# EAGLE board ece411_t2_schematic_FINAL (EAGLE 9.6.2)
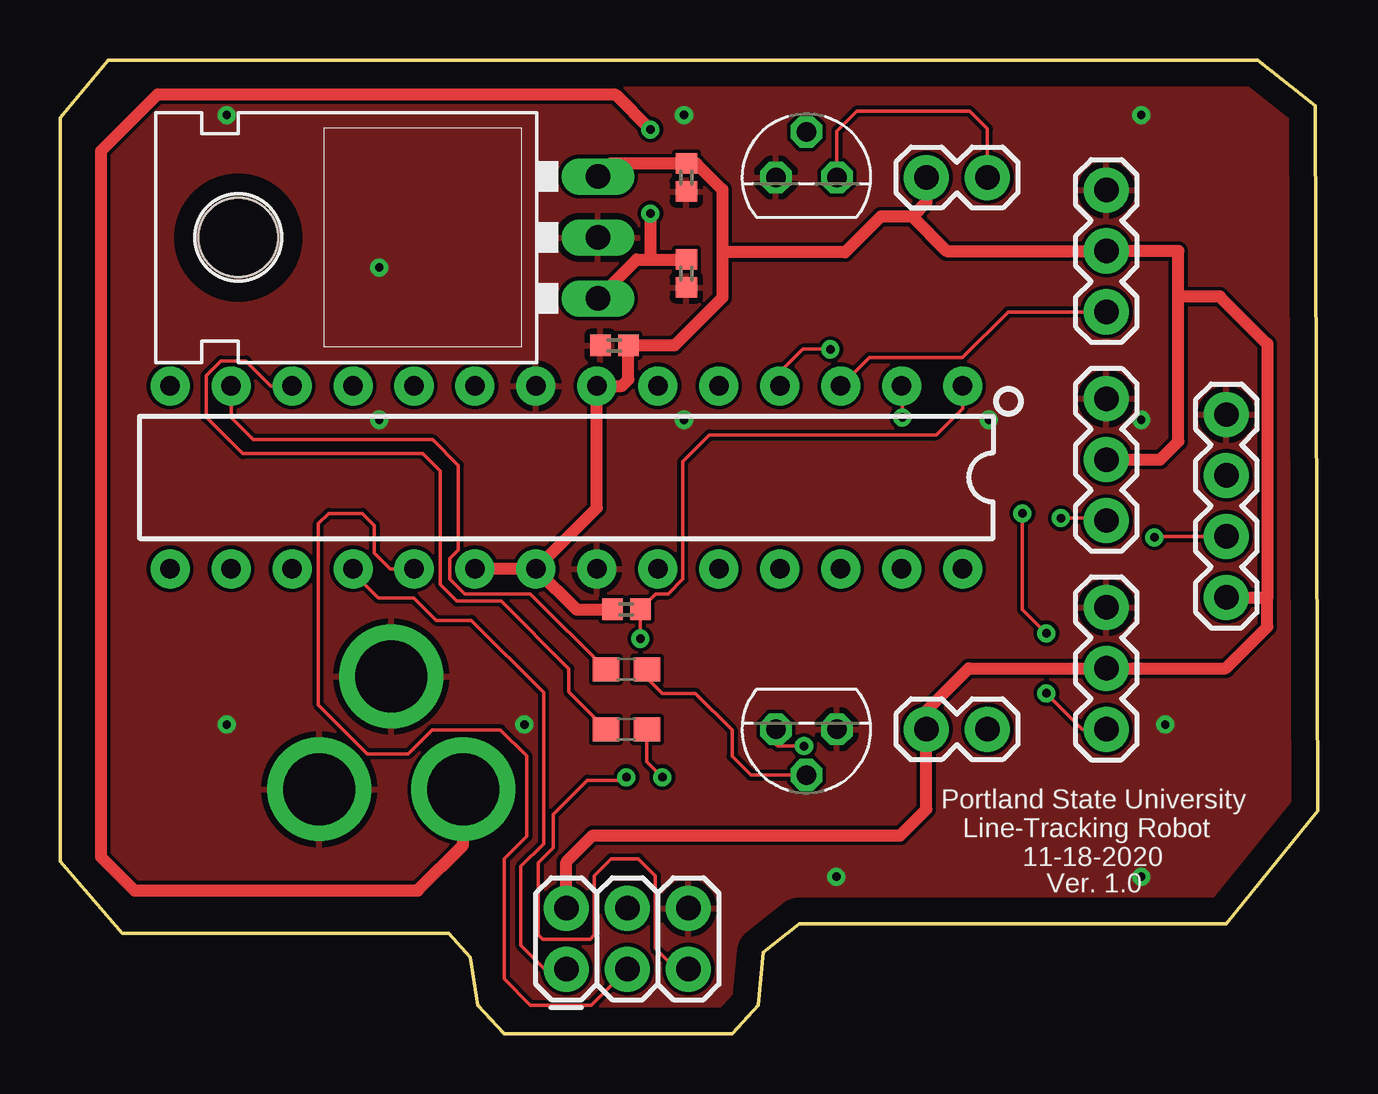
[diagram p0: board, top side]
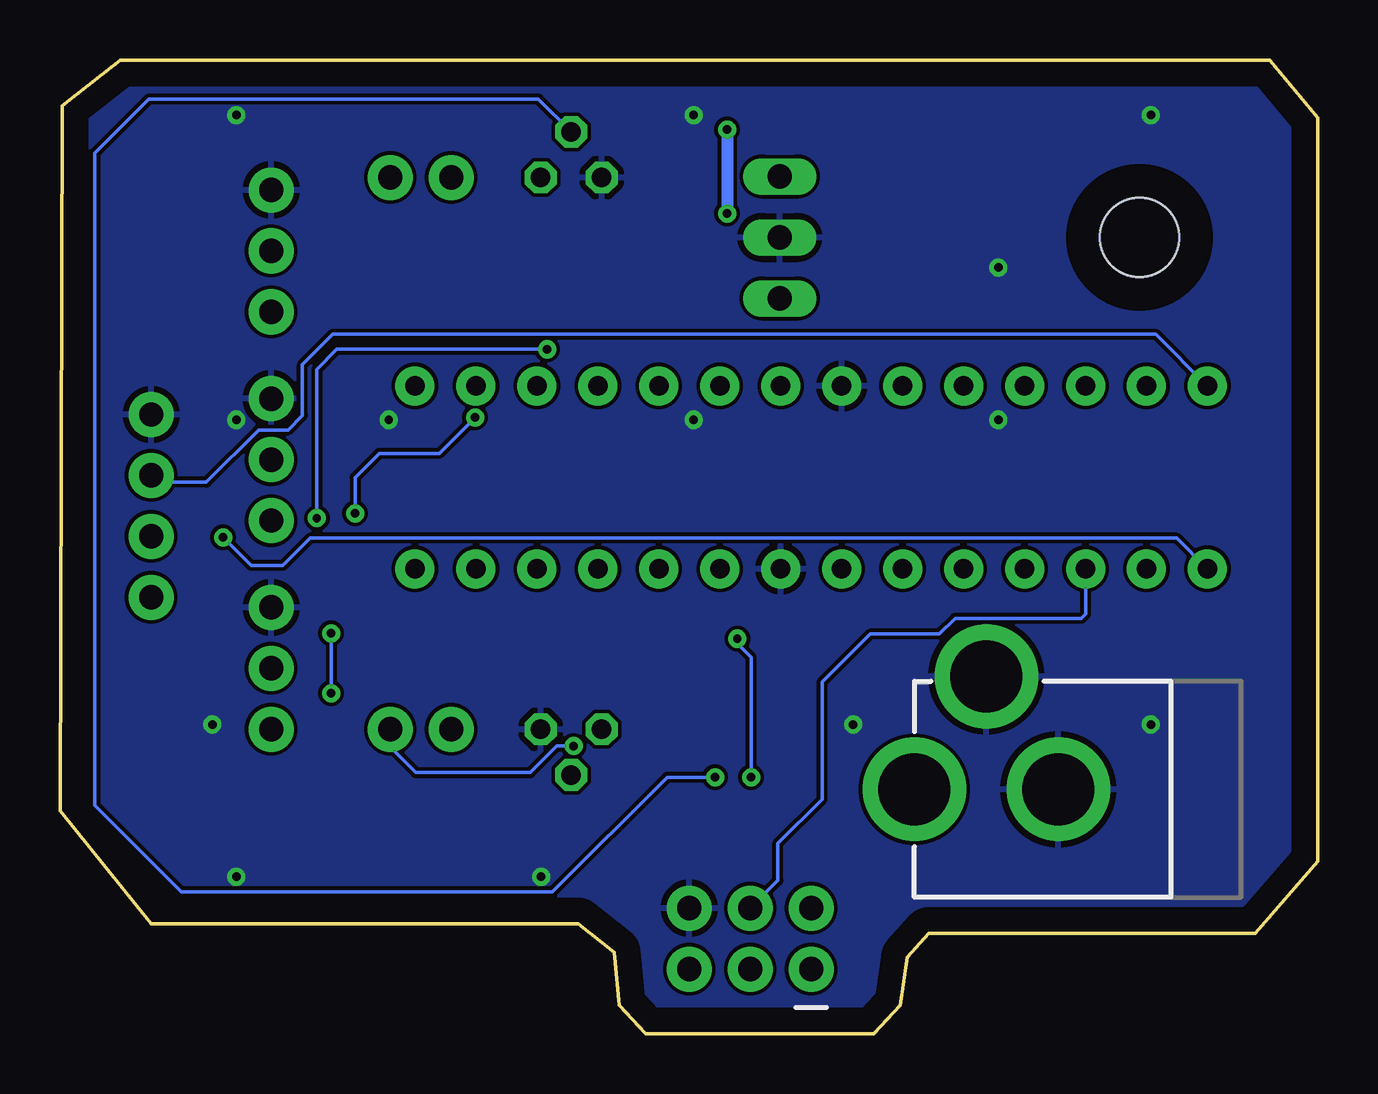
[diagram p1: board, bottom side, seen from below]

Size 52.4 x 40.6 mm. Coordinates in mm from the lower left corner, seen from the top.
Outline: 18.5,0 28,0 29.1,1.2 29.3,3.4 30.8,4.6 48.6,4.6 52.4,9.3 52.3,38.7 49.9,40.6 2,40.6 0,38.2 0,7.2 2.6,4.2 16.2,4.2 17.1,3.2 17.4,1.2 18.5,0
Copper layers (1*16): Top 0.035mm / dielectric 1.5mm / Bottom 0.035mm
Design rules "default": minimum track width 6mil, minimum drill 0.35mm, track to track 6mil, track to pad 6mil, pad to pad 6mil, via to via 6mil, smd to smd 6mil, copper to edge 40mil, drill to drill 6mil, minimum pad ring 10mil, minimum via ring 8mil, stop-mask expansion 4mil, vias tented up to drill 0mil, thermal gap 10mil

## Footprints (pad centres in the part's own frame; a part is rotated, then mirrored left to right if it is on the bottom)
0402 = smd 0.85 x 0.9: 1 -0.58,0; 2 0.58,0
2X3 = drill 1.016 pad 1.88: 1 0,0; 2 0,2.54; 3 2.54,0; 4 2.54,2.54; 5 5.08,0; 6 5.08,2.54
1X02 = drill 1.016 pad 1.88: 1 0,0; 2 2.54,0
1X04 = drill 1.016 pad 1.88: 1 0,0; 2 2.54,0; 3 5.08,0; 4 7.62,0
1X03 = drill 1.016 pad 1.88: 1 0,0; 2 2.54,0; 3 5.08,0
POWER_JACK_PTH = drill 2.997 pad 4.318: GND 0,7.7; GNDBREAK 4.7,10.7; PWR 0,13.7
0603 = smd 1.1 x 1: 1 -0.85,0; 2 0.85,0
TO92 = drill 0.813 octagon: 1 1.27,0; 2 0,1.905; 3 -1.27,0
DIP28 = drill 0.813 pad 1.626: 1 -16.51,-3.81; 2 -13.97,-3.81; 3 -11.43,-3.81; 4 -8.89,-3.81; 5 -6.35,-3.81; 6 -3.81,-3.81; 7 -1.27,-3.81; 8 1.27,-3.81; 9 3.81,-3.81; 10 6.35,-3.81; 11 8.89,-3.81; 12 11.43,-3.81; 13 13.97,-3.81; 14 16.51,-3.81; 15 16.51,3.81; 16 13.97,3.81; 17 11.43,3.81; 18 8.89,3.81; 19 6.35,3.81; 20 3.81,3.81; 21 1.27,3.81; 22 -1.27,3.81; 23 -3.81,3.81; 24 -6.35,3.81; 25 -8.89,3.81; 26 -11.43,3.81; 27 -13.97,3.81; 28 -16.51,3.81
TO-220-ALT = drill 1.016 long: GND 0,-3.81; IN -2.54,-3.81; OUT 2.54,-3.81 | hole 3.302: 0,11.176

## Placement (x,y rotation side)
C1  0.1uF  [0402]  26.1,35.7 270 top
C2  0.1uF  [0402]  26.1,31.7 270 top
C3  0.1uF  [0402]  23.1,28.7 180 top
J1  AVR_SPI_PROG_3X2PTH  [2X3]  21.1,2.7 0 top
J2  Right Motor  [1X02]  36.1,12.7 0 top
J3  Left Motor  [1X02]  36.1,35.7 0 top
J4  Ultra Sonic Sensor  [1X04]  48.6,18.2 90 top
J5  455-1750-1-ND  [1X03]  43.6,21.4 90 top
J6  455-1750-1-ND  [1X03]  43.6,12.7 90 top
J7  455-1750-1-ND  [1X03]  43.6,30.1 90 top
J9  POWER_JACK  [POWER_JACK_PTH]  3.1,10.2 90 bottom
R1  10k  [0402]  23.6,17.7 0 top
R2  2.2k  [0603]  23.6,15.2 0 top
R3  2.2k  [0603]  23.6,12.7 0 top
T2  2N3904  [TO92]  31.1,35.7 0 top
T4  2N3904  [TO92]  31.1,12.7 180 top
U1  328P  [DIP28]  21.1,23.2 180 top
U2  LM7805  [TO-220-ALT]  18.6,33.2 90 top

## Library data of the parts
C1-C3 = SparkFun-Capacitors; PROD_ID: CAP-14993
J1 = SparkFun-Connectors
J2 J3 = SparkFun-Retired
J4 = SparkFun-Connectors; PROD_ID: CONN-09696
J5-J7 = SparkFun-Connectors; PROD_ID: XXX-00000
J9 = SparkFun-Connectors; PROD_ID: CONN-08197
R1 = SparkFun-Resistors; PROD_ID: RES-14241
R2 R3 = SparkFun-Resistors; PROD_ID: RES-08272
T2 T4 = transistor
U1 = SparkFun-IC-Microcontroller; PROD_ID: IC-09136
U2 = SparkFun-IC-Power; PROD_ID: VREG-08450; SF_ID: COM-00107

## Nets
GND: C1.2 C2.2 C3.2 J1.6 J4.4 J5.3 J6.3 J7.3 J9.GND J9.GNDBREAK T2.3 T4.3 U1.8 U1.22 U2.GND
MOSI: J1.4 U1.17
N$1: R3.1 U1.12
N$2: J3.2 T2.1
N$3: R2.2 T4.2
N$4: R3.2 T2.2
N$5: J1.1 U1.18
N$6: J2.2 T4.1
N$7: J5.1 U1.4
N$8: J7.1 U1.3
N$9: J6.1 U1.2
N$10: J1.5 R1.2 U1.1
N$11: J4.2 U1.15
N$12: J4.3 U1.14
N$15: R2.1 U1.13
SCK: J1.3 U1.19
VCC: C1.1 C3.1 J1.2 J2.1 J3.1 J4.1 J5.2 J6.2 J7.2 R1.1 U1.7 U1.20 U1.21 U2.OUT
VIN: C2.1 J9.PWR U2.IN

## Tracks (layer width: path | path; a pad name or v marks a point on that pad's centre or on a via)
GND  (via drill 0.35)
  other vias: 45.05,38.3 26,38.3 6.95,38.3 13.3,31.95 26,25.6 45.05,25.6 6.95,12.9 19.35,12.9 46.05,12.9 38.7,25.6 13.3,25.6 32.35,6.55 45.05,6.55
  pour Bottom: 2.3,40.6 0,38.3 0,6.8 2.6,4.2 16.3,4.2 17.3,3.2 17.3,1.3 18.6,0 27.9,0 29.2,1.3 29.2,3.1 30.7,4.6 47.9,4.6 52.4,9.1 52.4,38.2 50,40.6
  pour Top: 2.3,40.6 0,38.3 0,6.8 2.6,4.2 16.3,4.2 17.3,3.2 17.3,1.3 18.6,0 27.9,0 29.2,1.3 29.2,3.1 30.7,4.6 48,4.6 52.4,9 52.4,38.2 50,40.6
MOSI
  Bottom 0.152: J1.4 22.49,6.4 22.49,7.95 20.65,9.78 20.65,14.67 18.65,16.67 15.76,16.67 15.11,17.32 9.84,17.32 9.67,17.5 U1.17
N$1
  Top 0.152: R3.1 21.2,14.25 21.2,15.22 18.38,18.04 16.53,18.04 15.84,18.73 15.84,23.46 15.12,24.18 7.61,24.18 6.09,25.71 6.09,27.44 6.7,28.05 7.75,28.05 8.79,27.01 U1.12
N$2
  Top 0.152: J3.2 38.64,37.73 37.9,38.47 33.2,38.47 32.37,37.64 T2.1
N$3
  Top 0.152: T4.2 28.78,10.79 28,11.57 28,12.67 26.47,14.2 25.1,14.2 24.45,14.85 R2.2
N$4  (via drill 0.35)
  Top 0.152: R3.2 24.45,11.35 v25.1,10.7
  Bottom 0.152: T2.2 32.46,38.97 48.7,38.97 50.95,36.72 50.95,9.52 47.35,5.92 31.88,5.92 27.1,10.7 v25.1,10.7
N$5
  Top 0.152: U1.18 12.21,19.22 13.25,18.18 14.73,18.18 15.67,17.24 17.14,17.24 20.15,14.23 20.15,7.93 19.2,6.98 19.2,3.7 20.2,2.7 J1.1
N$6  (via drill 0.35)
  Top 0.152: v31,12 29.9,12 29.83,12.07 T4.1
  Bottom 0.152: J2.2 38.64,11.96 37.58,10.9 32.8,10.9 31.7,12 v31,12
N$7  (via drill 0.35)
  Top 0.152: v41.7,21.5 43.5,21.5 J5.1 | v32.1,28.54 30.94,28.54 29.99,27.59 U1.4
  Bottom 0.152: v32.1,28.54 40.86,28.54 41.7,27.7 v41.7,21.5
N$8
  Top 0.152: U1.3 33.72,28.2 37.6,28.2 39.5,30.1 J7.1
N$9  (via drill 0.35)
  Top 0.152: U1.2 35.1,26.98 v35.1,25.7 | v40.1,21.7 40.1,17.7 v41.1,16.7 | v41.1,14.2 42.6,12.7 J6.1
  Bottom 0.152: v35.1,25.7 36.6,24.2 39.1,24.2 40.1,23.2 v40.1,21.7 | v41.1,16.7 v41.1,14.2
N$10  (via drill 0.35)
  Top 0.152: v24.18,16.47 R1.2 24.83,18.35 25.34,18.35 25.95,18.96 25.95,23.86 27.06,24.97 36.5,24.97 37.61,26.08 U1.1 | J1.5 25.68,2.7 24.81,3.57 24.81,6.59 24.1,7.3 22.98,7.3 22.27,6.59 22.27,4.13 22.08,3.94 20.12,3.94 19.93,4.13 19.93,7.13 20.55,7.75 20.55,9.15 21.97,10.57 23.47,10.57 v23.6,10.7
  Bottom 0.152: v23.6,10.7 23.6,15.7 24.18,16.28 v24.18,16.47
N$11  (via drill 0.35)
  Top 0.152: v45.6,20.7 45.64,20.74 J4.2
  Bottom 0.152: U1.15 5.87,20.67 41.98,20.67 43.12,19.53 44.43,19.53 v45.6,20.7
N$12
  Bottom 0.152: U1.14 6.75,29.17 41.03,29.17 42.3,27.9 42.3,25.78 42.9,25.18 44.12,25.18 46.3,23 48.32,23 J4.3
N$15
  Top 0.152: U1.13 7.13,25.7 8.06,24.77 15.53,24.77 16.6,23.7 16.6,20.17 16.25,19.82 16.25,18.96 16.86,18.35 19.6,18.35 R2.1
SCK
  Top 0.152: U1.19 13.75,19.39 13.1,20.04 13.1,21.2 12.6,21.7 11.2,21.7 10.77,21.27 10.77,13.72 12.81,11.68 14.5,11.68 15.5,12.68 18.35,12.68 19.45,11.58 19.45,8.23 18.51,7.29 18.51,2.29 19.6,1.2 22.14,1.2 J1.3
VCC
  Top 0.5: J3.1 36.1,34.67 35.5,34.07 | 35.5,34.07 34.2,34.07 32.72,32.59 27.71,32.59 27.6,32.7 | J1.2 21.1,7.17 22.2,8.27 35,8.27 36.1,9.37 J2.1 36.1,13.47 37.87,15.24 J6.2 48.57,15.24 50.3,16.97 50.3,18.2 | 46.6,30.74 48.33,30.74 50.3,28.77 50.3,18.2 | 35.5,34.07 36.93,32.64 J7.2 46.6,32.64 46.6,30.74 | U1.21 22.37,21.93 U1.7 23.41,27.01 23.68,27.28 C3.1 25.6,28.7 27.6,30.7 27.6,32.7 | 27.6,32.7 27.6,35.2 26.52,36.28 C1.1 22.95,36.28 U2.OUT | J4.1 50.3,18.2 | J5.2 45.84,23.94 46.6,24.7 46.6,30.74 | U1.21 U1.20 | R1.1 23,17.68 21.55,17.68 U1.21
VIN  (via drill 0.35)
  Top 0.5: J9.PWR 16.8,7.87 14.91,5.98 3.1,5.98 1.7,7.38 1.7,36.8 4.07,39.17 23.13,39.17 v24.6,37.7 | U2.IN 24.03,32.28 24.6,32.28 | 24.6,32.28 C2.1 | v24.6,34.2 24.6,32.28
  Bottom 0.5: v24.6,37.7 v24.6,34.2

## Text on the board
tPlace: Portland State University | Line-Tracking Robot | 11-18-2020 | Ver. 1.0